# EAGLE board mbhp_ainx4_v2 (EAGLE 4.03)
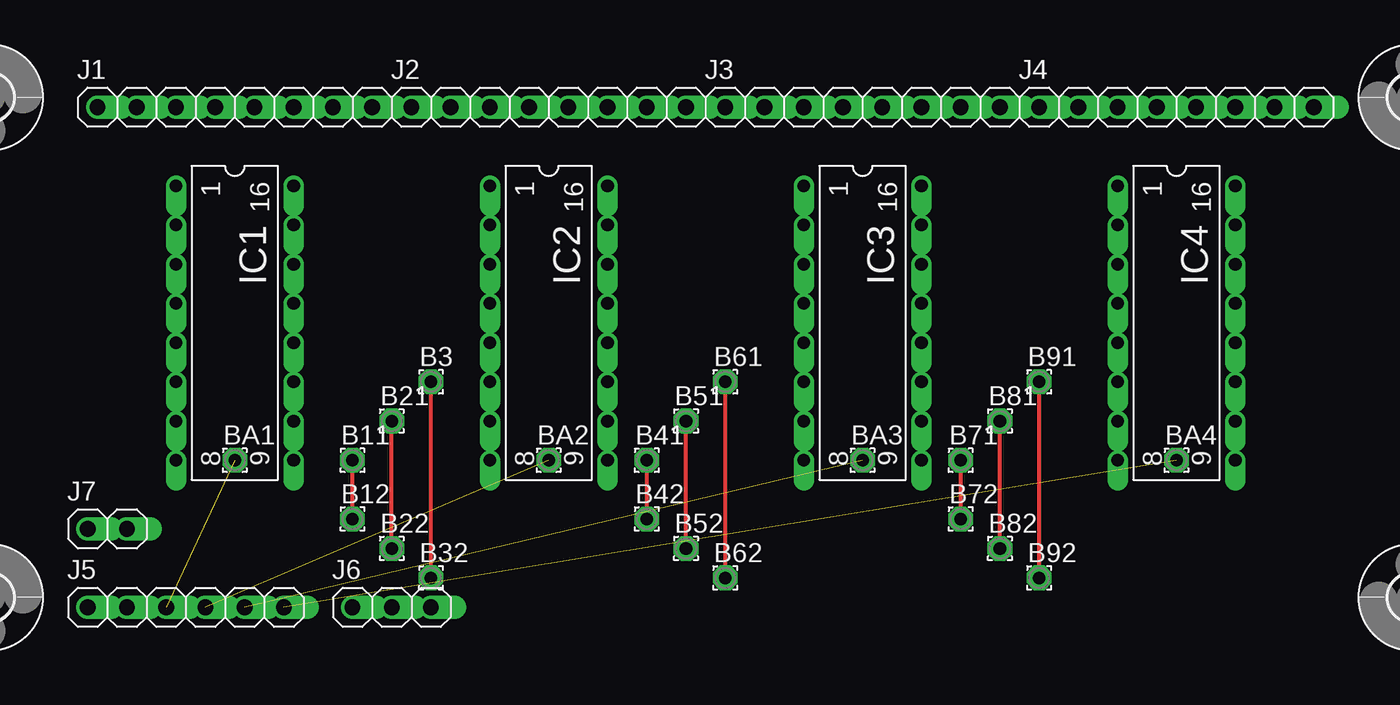
[diagram p0: board, top side]
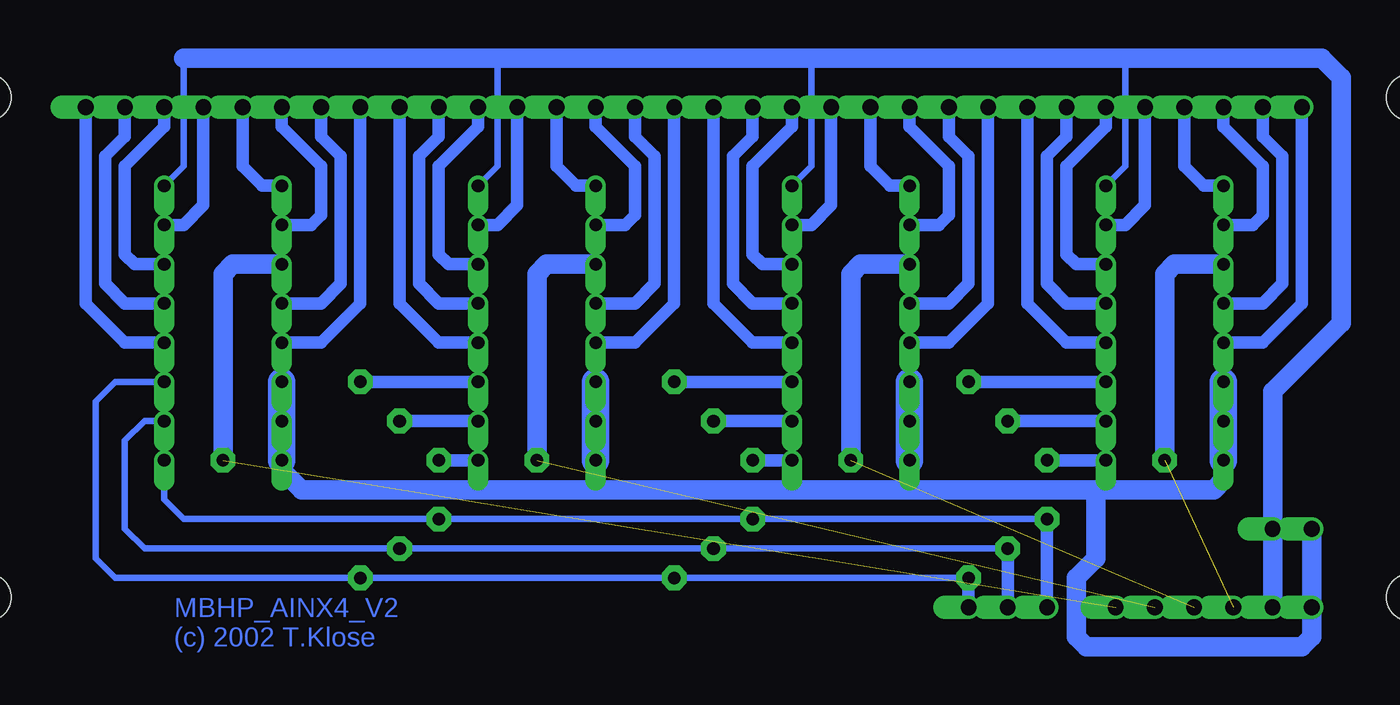
[diagram p1: board, bottom side, seen from below]

No outline drawn. Coordinates in mm, seen from the top.
Copper layers used: Top, Bottom

## Footprints (pad centres in the part's own frame; a part is rotated, then mirrored left to right if it is on the bottom)
1,6/0,8 = drill 0.813 pad 1.6 octagon: 1 0,0
3,0 = hole 3: 0,0
DIL16 = drill 0.813 offset: 1 -8.89,-3.81; 2 -6.35,-3.81; 3 -3.81,-3.81; 4 -1.27,-3.81; 5 1.27,-3.81; 6 3.81,-3.81; 7 6.35,-3.81; 8 8.89,-3.81; 9 8.89,3.81; 10 6.35,3.81; 11 3.81,3.81; 12 1.27,3.81; 13 -1.27,3.81; 14 -3.81,3.81; 15 -6.35,3.81; 16 -8.89,3.81
1X08 = drill 1.016 offset: 1 -8.89,0; 2 -6.35,0; 3 -3.81,0; 4 -1.27,0; 5 1.27,0; 6 3.81,0; 7 6.35,0; 8 8.89,0
1X06 = drill 1.016 offset: 1 -6.35,0; 2 -3.81,0; 3 -1.27,0; 4 1.27,0; 5 3.81,0; 6 6.35,0
1X03 = drill 1.016 offset: 1 -2.54,0; 2 0,0; 3 2.54,0
1X02 = drill 1.016 offset: 1 -1.27,0; 2 1.27,0

## Placement (x,y rotation side)
B3  [1,6/0,8]  32.38,17.78 0 top
B11  [1,6/0,8]  27.3,12.7 0 top
B12  [1,6/0,8]  27.3,8.89 0 top
B21  [1,6/0,8]  29.84,15.24 0 top
B22  [1,6/0,8]  29.84,6.99 0 top
B32  [1,6/0,8]  32.38,5.08 0 top
B41  [1,6/0,8]  46.35,12.7 0 top
B42  [1,6/0,8]  46.35,8.89 0 top
B51  [1,6/0,8]  48.9,15.24 0 top
B52  [1,6/0,8]  48.9,6.99 0 top
B61  [1,6/0,8]  51.44,17.78 0 top
B62  [1,6/0,8]  51.44,5.08 0 top
B71  [1,6/0,8]  66.67,12.7 0 top
B72  [1,6/0,8]  66.67,8.89 0 top
B81  [1,6/0,8]  69.22,15.24 0 top
B82  [1,6/0,8]  69.22,6.99 0 top
B91  [1,6/0,8]  71.75,17.78 0 top
B92  [1,6/0,8]  71.75,5.08 0 top
BA1  [1,6/0,8]  19.68,12.7 0 top
BA2  [1,6/0,8]  40.01,12.7 0 top
BA3  [1,6/0,8]  60.33,12.7 0 top
BA4  [1,6/0,8]  80.64,12.7 0 top
E$1  [3,0]  3.81,36.2 0 top
E$2  [3,0]  3.81,3.81 0 top
E$3  [3,0]  95.89,3.81 0 top
E$4  [3,0]  95.89,36.2 0 top
IC1  4051  [DIL16]  19.68,21.59 270 top
IC2  4051  [DIL16]  40.01,21.59 270 top
IC3  4051  [DIL16]  60.33,21.59 270 top
IC4  4051  [DIL16]  80.64,21.59 270 top
J1  [1X08]  19.68,35.56 0 top
J2  [1X08]  40.01,35.56 0 top
J3  [1X08]  60.33,35.56 0 top
J4  [1X08]  80.64,35.56 0 top
J5  [1X06]  16.51,3.17 0 top
J6  [1X03]  29.84,3.17 0 top
J7  [1X02]  11.43,8.26 0 top

## Library data of the parts
B3 B11 B12 B21 B22 B32 B41 B42 B51 B52 B61 B62 B71 B72 B81 B82 B91 B92 BA1-BA4 = wirepad
E$1-E$4 = holes
IC1-IC4 = 40xx
J1-J7 = pinhead

## Nets
B31: B3.1 B32.1 B61.1 B62.1 B91.1 B92.1 IC1.11 IC2.11 IC3.11 IC4.11 J6.3
B52: B21.1 B22.1 B51.1 B52.1 B81.1 B82.1 IC1.10 IC2.10 IC3.10 IC4.10 J6.2
S$1: IC1.5 J1.1
S$2: IC1.4 J1.2
S$3: IC1.2 J1.3
S$4: IC1.1 J1.4
S$5: IC1.15 J1.5
S$6: IC1.14 J1.6
S$7: IC1.13 J1.7
S$8: IC1.12 J1.8
S$11: IC2.5 J2.1
S$12: B11.1 B12.1 B41.1 B42.1 B71.1 B72.1 IC1.9 IC2.9 IC3.9 IC4.9 J6.1
S$13: IC2.4 J2.2
S$14: IC2.2 J2.3
S$15: IC2.1 J2.4
S$16: IC2.15 J2.5
S$17: IC2.14 J2.6
S$18: IC2.13 J2.7
S$19: IC2.12 J2.8
S$20: BA1.1 IC1.3 J5.3
S$30: BA2.1 IC2.3 J5.4
S$31: BA3.1 IC3.3 J5.5
S$32: IC3.5 J3.1
S$33: IC3.4 J3.2
S$34: IC3.2 J3.3
S$35: IC3.1 J3.4
S$36: IC3.15 J3.5
S$37: IC3.14 J3.6
S$38: IC3.13 J3.7
S$39: IC3.12 J3.8
S$40: IC4.5 J4.1
S$41: IC4.4 J4.2
S$42: IC4.2 J4.3
S$43: IC4.1 J4.4
S$44: IC4.15 J4.5
S$45: IC4.14 J4.6
S$46: IC4.13 J4.7
S$47: IC4.12 J4.8
S$48: BA4.1 IC4.3 J5.6
VDD: IC1.16 IC2.16 IC3.16 IC4.16 J5.2 J7.2
VSS: IC1.6 IC1.7 IC1.8 IC2.6 IC2.7 IC2.8 IC3.6 IC3.7 IC3.8 IC4.6 IC4.7 IC4.8 J5.1 J7.1

## Tracks (layer width: path | path; a pad name or v marks a point on that pad's centre or on a via)
B31
  Top 0.254: B92.1 B91.1 | B62.1 B61.1 | B32.1 B3.1
  Bottom 0.406: B32.1 B62.1 B92.1 87.63,5.08 88.9,6.35 88.9,16.51 87.63,17.78 IC4.11
  Bottom 0.813: B3.1 IC1.11 | B91.1 IC3.11 | B61.1 IC2.11 | J6.3 B32.1
B52
  Top 0.254: B82.1 B81.1 | B52.1 B51.1 | B22.1 B21.1
  Bottom 0.406: B22.1 B52.1 B82.1 85.72,6.99 87,8.26 87,13.97 85.72,15.24 IC4.10
  Bottom 0.813: B21.1 IC1.10 | B51.1 IC2.10 | B81.1 IC3.10 | J6.2 B22.1
S$1
  Bottom 0.813: J1.1 10.79,22.86 13.34,20.32 IC1.5
S$2
  Bottom 0.813: J1.2 13.34,33.66 12.06,32.38 12.06,24.13 13.34,22.86 IC1.4
S$3
  Bottom 0.813: J1.3 15.88,34.29 13.34,31.75 13.34,28.57 13.97,27.94 IC1.2
S$4
  Bottom 0.813: J1.4 18.41,31.75 17.14,30.48 IC1.1
S$5
  Bottom 0.813: J1.5 20.95,29.21 22.23,27.94 IC1.15
S$6
  Bottom 0.813: J1.6 23.5,34.29 26.04,31.75 26.04,26.04 25.4,25.4 IC1.14
S$7
  Bottom 0.813: J1.7 26.04,33.66 27.3,32.38 27.3,24.13 26.04,22.86 IC1.13
S$8
  Bottom 0.813: J1.8 28.57,22.86 26.04,20.32 IC1.12
S$11
  Bottom 0.813: IC2.5 33.66,20.32 31.11,22.86 J2.1
S$12
  Top 0.254: B72.1 B71.1 | B42.1 B41.1 | B12.1 B11.1
  Bottom 0.406: B12.1 B42.1 B72.1 83.19,8.89 84.45,10.16 IC4.9
  Bottom 0.813: B11.1 IC1.9 | B41.1 IC2.9 | B71.1 IC3.9 | J6.1 B12.1
S$13
  Bottom 0.813: IC2.4 33.66,22.86 32.38,24.13 32.38,32.38 33.66,33.66 J2.2
S$14
  Bottom 0.813: IC2.2 34.29,27.94 33.66,28.57 33.66,31.75 36.2,34.29 J2.3
S$15
  Bottom 0.813: J2.4 38.73,31.75 37.47,30.48 IC2.1
S$16
  Bottom 0.813: J2.5 41.27,29.21 42.55,27.94 IC2.15
S$17
  Bottom 0.813: J2.6 43.81,34.29 46.35,31.75 46.35,26.04 45.72,25.4 IC2.14
S$18
  Bottom 0.813: J2.7 46.35,33.66 47.62,32.38 47.62,24.13 46.35,22.86 IC2.13
S$19
  Bottom 0.813: J2.8 48.9,22.86 46.35,20.32 IC2.12
S$20  (1 unrouted)
  Bottom 1.27: IC1.3 19.05,25.4 19.68,24.77 BA1.1
S$30  (1 unrouted)
  Bottom 1.27: IC2.3 39.37,25.4 40.01,24.77 BA2.1
S$31  (1 unrouted)
  Bottom 1.27: IC3.3 59.69,25.4 60.33,24.77 BA3.1
S$32
  Bottom 0.813: J3.1 51.44,22.86 53.98,20.32 IC3.5
S$33
  Bottom 0.813: J3.2 53.98,33.66 52.7,32.38 52.7,24.13 53.98,22.86 IC3.4
S$34
  Bottom 0.813: J3.3 56.52,34.29 53.98,31.75 53.98,28.57 54.61,27.94 IC3.2
S$35
  Bottom 0.813: J3.4 59.05,31.75 57.78,30.48 IC3.1
S$36
  Bottom 0.813: J3.5 61.59,29.21 62.87,27.94 IC3.15
S$37
  Bottom 0.813: J3.6 64.14,34.29 66.67,31.75 66.67,26.04 66.04,25.4 IC3.14
S$38
  Bottom 0.813: J3.7 66.67,33.66 67.94,32.38 67.94,24.13 66.67,22.86 IC3.13
S$39
  Bottom 0.813: J3.8 69.22,22.86 66.67,20.32 IC3.12
S$40
  Bottom 0.813: J4.1 71.75,22.86 74.3,20.32 IC4.5
S$41
  Bottom 0.813: J4.2 74.3,33.66 73.03,32.38 73.03,24.13 74.3,22.86 IC4.4
S$42
  Bottom 0.813: J4.3 76.83,34.29 74.3,31.75 74.3,28.57 74.93,27.94 IC4.2
S$43
  Bottom 0.813: J4.4 79.38,31.75 78.11,30.48 IC4.1
S$44
  Bottom 0.813: J4.5 81.92,29.21 83.19,27.94 IC4.15
S$45
  Bottom 0.813: J4.6 84.45,34.29 87,31.75 87,26.04 86.36,25.4 IC4.14
S$46
  Bottom 0.813: J4.7 87,33.66 88.27,32.38 88.27,24.13 87,22.86 IC4.13
S$47
  Bottom 0.813: J4.8 89.53,22.86 87,20.32 IC4.12
S$48  (1 unrouted)
  Bottom 1.27: IC4.3 80.01,25.4 80.64,24.77 BA4.1
VDD
  Bottom 0.406: IC4.16 83.19,31.75 83.19,38.73 | IC3.16 62.87,31.75 62.87,38.73 | IC2.16 42.55,31.75 42.55,38.73 | IC1.16 22.23,31.75 22.23,38.73
  Bottom 1.27: 83.19,38.73 62.87,38.73 42.55,38.73 22.23,38.73 9.53,38.73 8.26,37.47 8.26,21.59 12.7,17.14 J7.2 J5.2
VSS
  Bottom 1.27: IC4.8 76.83,12.06 75.56,10.79 56.52,10.79 | 36.2,10.79 56.52,10.79 | 36.2,10.79 IC2.8 | 24.13,10.79 36.2,10.79 | 56.52,10.79 IC3.6 | J7.1 J5.1 10.16,1.27 10.79,0.64 24.77,0.64 25.4,1.27 25.4,5.08 24.13,6.35 24.13,10.79 | 24.13,10.79 16.51,10.79 15.88,11.43 IC1.8
  Bottom 1.778: IC2.8 IC2.7 IC2.6 | IC1.8 IC1.7 IC1.6 | IC3.8 IC3.7 IC3.6 | IC4.8 IC4.7 IC4.6

## Text on the board
Bottom: MBHP_AINX4_V2 | (c) 2002 T.Klose